# EAGLE board ChladniEagle (EAGLE 9.4.2)

Size 98.73 x 90.16 mm. Coordinates in mm from the lower left corner, seen from the top.
Outline: 0,0 98.73,0 98.73,90.16 0,90.16 0,0
Copper layers (1*16): Top 0.035mm / dielectric 1.5mm / Bottom 0.035mm
Design rules "default *": minimum track width 32mil, minimum drill 0.35mm, track to track 6mil, track to pad 6mil, pad to pad 6mil, via to via 6mil, smd to smd 6mil, copper to edge 40mil, drill to drill 6mil, minimum pad ring 10mil, minimum via ring 8mil, stop-mask expansion 4mil, vias tented up to drill 0mil, thermal gap 10mil

## Footprints (pad centres in the part's own frame; a part is rotated, then mirrored left to right if it is on the bottom)
DIP28 = drill 0.813 pad 1.626: 1 -16.51,-3.81; 2 -13.97,-3.81; 3 -11.43,-3.81; 4 -8.89,-3.81; 5 -6.35,-3.81; 6 -3.81,-3.81; 7 -1.27,-3.81; 8 1.27,-3.81; 9 3.81,-3.81; 10 6.35,-3.81; 11 8.89,-3.81; 12 11.43,-3.81; 13 13.97,-3.81; 14 16.51,-3.81; 15 16.51,3.81; 16 13.97,3.81; 17 11.43,3.81; 18 8.89,3.81; 19 6.35,3.81; 20 3.81,3.81; 21 1.27,3.81; 22 -1.27,3.81; 23 -3.81,3.81; 24 -6.35,3.81; 25 -8.89,3.81; 26 -11.43,3.81; 27 -13.97,3.81; 28 -16.51,3.81
C025-024X044 = drill 0.813 pad 1.422 octagon: 1 -1.27,0; 2 1.27,0
E2,5-6E = drill 0.813 pad 1.778: + -1.27,0 | drill 0.813 pad 1.778 octagon: - 1.27,0
HC49US = drill 0.7 pad 1.651: 1 -2.54,0; 2 2.54,0
1X05_NO_SILK = drill 1.016 pad 1.88: 1 0,0; 2 2.54,0; 3 5.08,0; 4 7.62,0; 5 10.16,0
04C = drill 0.813 pad 1.905 octagon: 1 -1.905,0; 2 1.905,0; 3 5.715,0
PG203J = drill 1.499 octagon: 1 -5.004,-0.203; 4 5.74,-4.369; 5 -1.753,-4.902 | drill 1.499: 2 2.845,4.902; 3 1.448,2.388
POWER_JACK_PTH = drill 2.997 pad 4.318: GND 0,7.7; GNDBREAK 4.7,10.7; PWR 0,13.7
LCD1602 = drill 0.8 long: 1 8,33.46; 2 10.54,33.46; 3 13.08,33.46; 4 15.62,33.46; 5 18.16,33.46; 6 20.7,33.46; 7 23.24,33.46; 8 25.78,33.46; 9 28.32,33.46; 10 30.86,33.46; 11 33.4,33.46; 12 35.94,33.46; 13 38.48,33.46; 14 41.02,33.46; 15 43.56,33.46; 16 46.1,33.46 | hole 2.8: 2.54,2.54; 2.54,33.46; 77.46,33.46; 77.46,2.54
LED5MM = drill 0.813 pad 1.676 octagon: A -1.27,0; K 1.27,0
0204/7 = drill 0.813 octagon: 1 -3.81,0; 2 3.81,0
TO-220-ALT = drill 1.016 long: GND 0,-3.81; IN -2.54,-3.81; OUT 2.54,-3.81 | hole 3.302: 0,11.176
TACTILE_SWITCH_PTH_6.0MM = drill 1.016 pad 1.88: 1 -3.251,2.261; 2 3.251,2.261; 3 -3.251,-2.261; 4 3.251,-2.261

## Placement (x,y rotation side)
ATMEGA  328P  [DIP28]  26.42,58.93 90 top
C1_CRISTAL  [C025-024X044]  23.37,57.4 90 top
C1_REG  [E2,5-6E]  82.04,60.71 270 top
C1_VCC  [C025-024X044]  60.96,56.39 90 top
C2_CRISTAL  [C025-024X044]  49.78,59.94 90 top
C2_REG  [E2,5-6E]  75.95,60.45 270 top
C2_VCC  [C025-024X044]  43.69,49.78 90 top
C_JACK  [E2,5-6E]  9.4,68.33 270 top
CRISTAL  16MHz  [HC49US]  18.03,69.6 0 top
ENCODER  [1X05_NO_SILK]  44.7,63.75 180 top
J2  [04C]  92.96,58.42 180 top
JACK  PG203J  [PG203J]  7.87,56.39 180 top
JACK_9V  POWER_JACK  [POWER_JACK_PTH]  97.79,48.01 90 top
LCD  HD44780LCD-1602  [LCD1602]  0,1.27 0 top
LED1  [LED5MM]  44.2,75.69 90 top
R_LCD  [0204/7]  47.5,39.62 0 top
R_LED  [0204/7]  34.04,79.76 90 top
REGULADOR  [TO-220-ALT]  90.93,73.15 0 top
RESET  [0204/7]  58.93,39.62 0 top
SWITCH_RESET  MOMENTARY-SWITCH-SPST-PTH-6.0MM  [TACTILE_SWITCH_PTH_6.0MM]  53.34,75.44 90 top

## Library data of the parts
ATMEGA = SparkFun-IC-Microcontroller; PROD_ID: IC-09136
C1_CRISTAL C2_CRISTAL = adafruit; CAPACITANCIA: 22pF
C1_REG = adafruit; CAPACITANCIA: 0.33uF
C1_VCC C2_VCC = adafruit; CAPACITANCIA: 100nF
C2_REG = adafruit; CAPACITANCIA: 0.1uF
C_JACK = adafruit; CAPACITANCIA: 2.2uF
CRISTAL = SparkFun-Clocks; PROD_ID: XTAL-08181; SF_ID: COM-00536
ENCODER = SparkFun-Connectors
J2 = jumper
JACK = con-hirschmann; OC_FARNELL: unknown; OC_NEWARK: unknown
JACK_9V = SparkFun-Connectors; PROD_ID: CONN-08197
LCD LED1 = adafruit
R_LCD R_LED = rcl; RESISTENCIA: 220; SPICEPREFIX: R
REGULADOR = SparkFun-IC-Power; PROD_ID: VREG-08450; SF_ID: COM-00107
RESET = rcl; RESISTENCIA: 10k; SPICEPREFIX: R
SWITCH_RESET = SparkFun-Switches; PROD_ID: SWCH-08441; SF_SKU: COM-00097

## Nets
GND: ATMEGA.8 ATMEGA.22 C1_CRISTAL.2 C1_VCC.2 C2_CRISTAL.2 C2_VCC.2 ENCODER.1 JACK.1 JACK_9V.GND JACK_9V.GNDBREAK R_LED.2 SWITCH_RESET.3
N$1: C1_REG.+ J2.3 REGULADOR.IN
N$2: ATMEGA.9 C2_CRISTAL.1 CRISTAL.2
N$3: ATMEGA.10 C1_CRISTAL.1 CRISTAL.1
N$4: LED1.K R_LED.1
N$5: ATMEGA.1 RESET.2 SWITCH_RESET.1
N$6: J2.1 J2.2 JACK_9V.PWR
N$7: C_JACK.- JACK.5
N$8: LCD.15 R_LCD.1
N$9: ATMEGA.19 LCD.14
N$10: ATMEGA.5 LCD.13
N$11: ATMEGA.13 LCD.12
N$12: ATMEGA.11 LCD.11
N$13: ATMEGA.17 LCD.6
N$14: ATMEGA.16 C_JACK.+
N$15: ATMEGA.18 LCD.4
N$16: ATMEGA.12 LCD.3
N$17: ATMEGA.6 ENCODER.5
N$18: ATMEGA.4 ENCODER.4
N$20: ATMEGA.24 ENCODER.3
VCC: ATMEGA.7 ATMEGA.20 ATMEGA.21 C1_VCC.1 C2_REG.+ C2_VCC.1 ENCODER.2 LCD.2 LED1.A R_LCD.2 REGULADOR.OUT RESET.1
VSS: C1_REG.- C2_REG.- LCD.1 LCD.5 LCD.16 REGULADOR.GND

## Tracks (layer width: path | path; a pad name or v marks a point on that pad's centre or on a via)
GND  (11 unrouted)
N$1  (2 unrouted)
N$2  (2 unrouted)
N$3  (2 unrouted)
N$4  (1 unrouted)
N$5  (2 unrouted)
N$6  (2 unrouted)
N$7  (1 unrouted)
N$8  (1 unrouted)
N$9  (1 unrouted)
N$10  (1 unrouted)
N$11  (1 unrouted)
N$12  (1 unrouted)
N$13  (1 unrouted)
N$14  (1 unrouted)
N$15  (1 unrouted)
N$16  (1 unrouted)
N$17  (1 unrouted)
N$18  (1 unrouted)
N$20  (1 unrouted)
VCC  (11 unrouted)
VSS  (5 unrouted)
(copper drawn outside any net)
  shapes: Top area x2